# Altium PCB PCB_2020-12-05_22-15-21_2020-12-05_22-35-56.pcbdoc
Units mil, origin at the board's own origin, x right, y up, seen from the top; angles counter-clockwise.
Board outline 4410 x 3910 mil, 2 copper layers (Top Layer, Bottom Layer); 53 components, 84 nets, 253 pads, 0 vias.
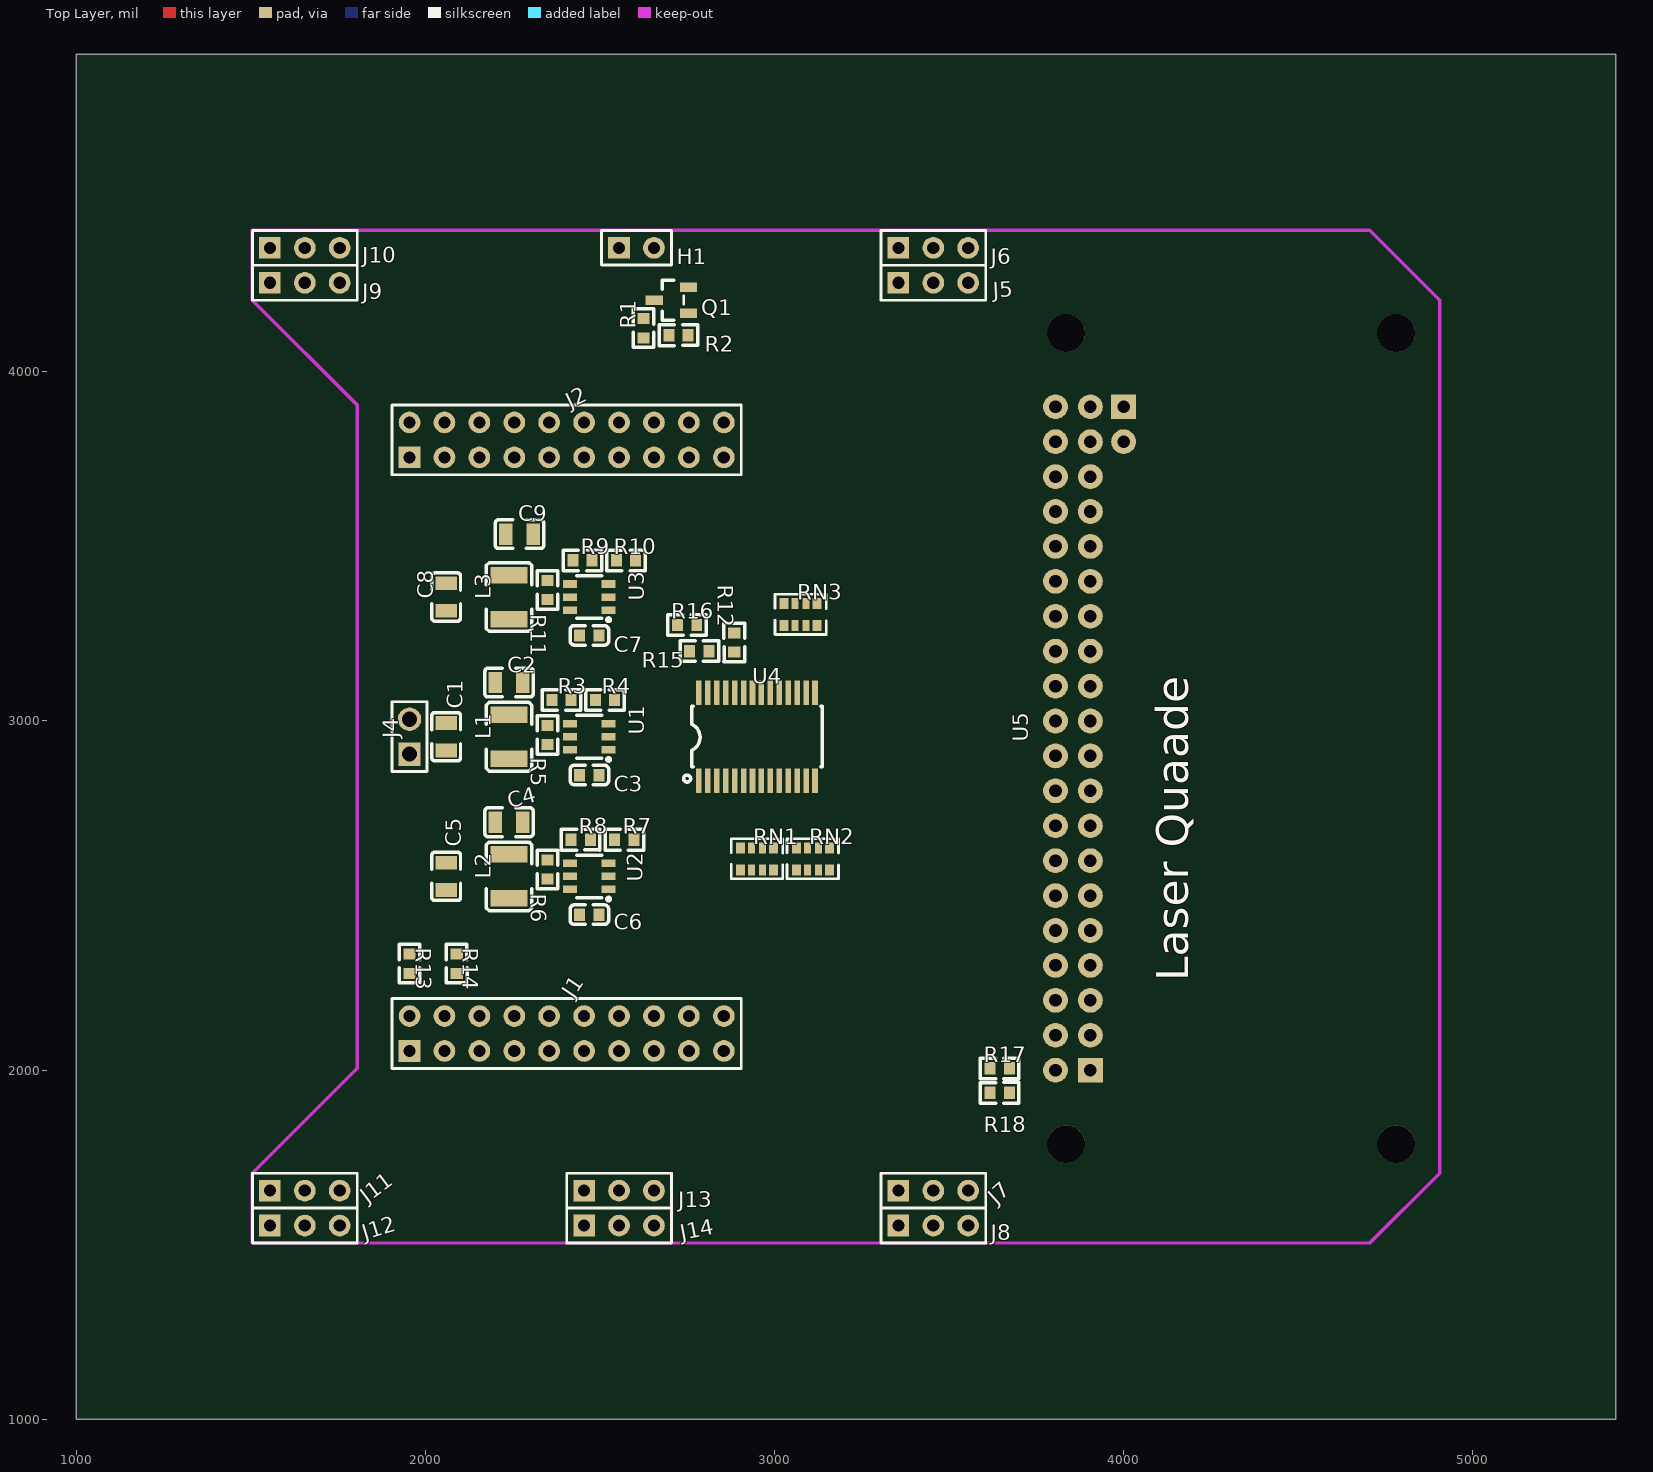
[diagram p0: Top Layer view]
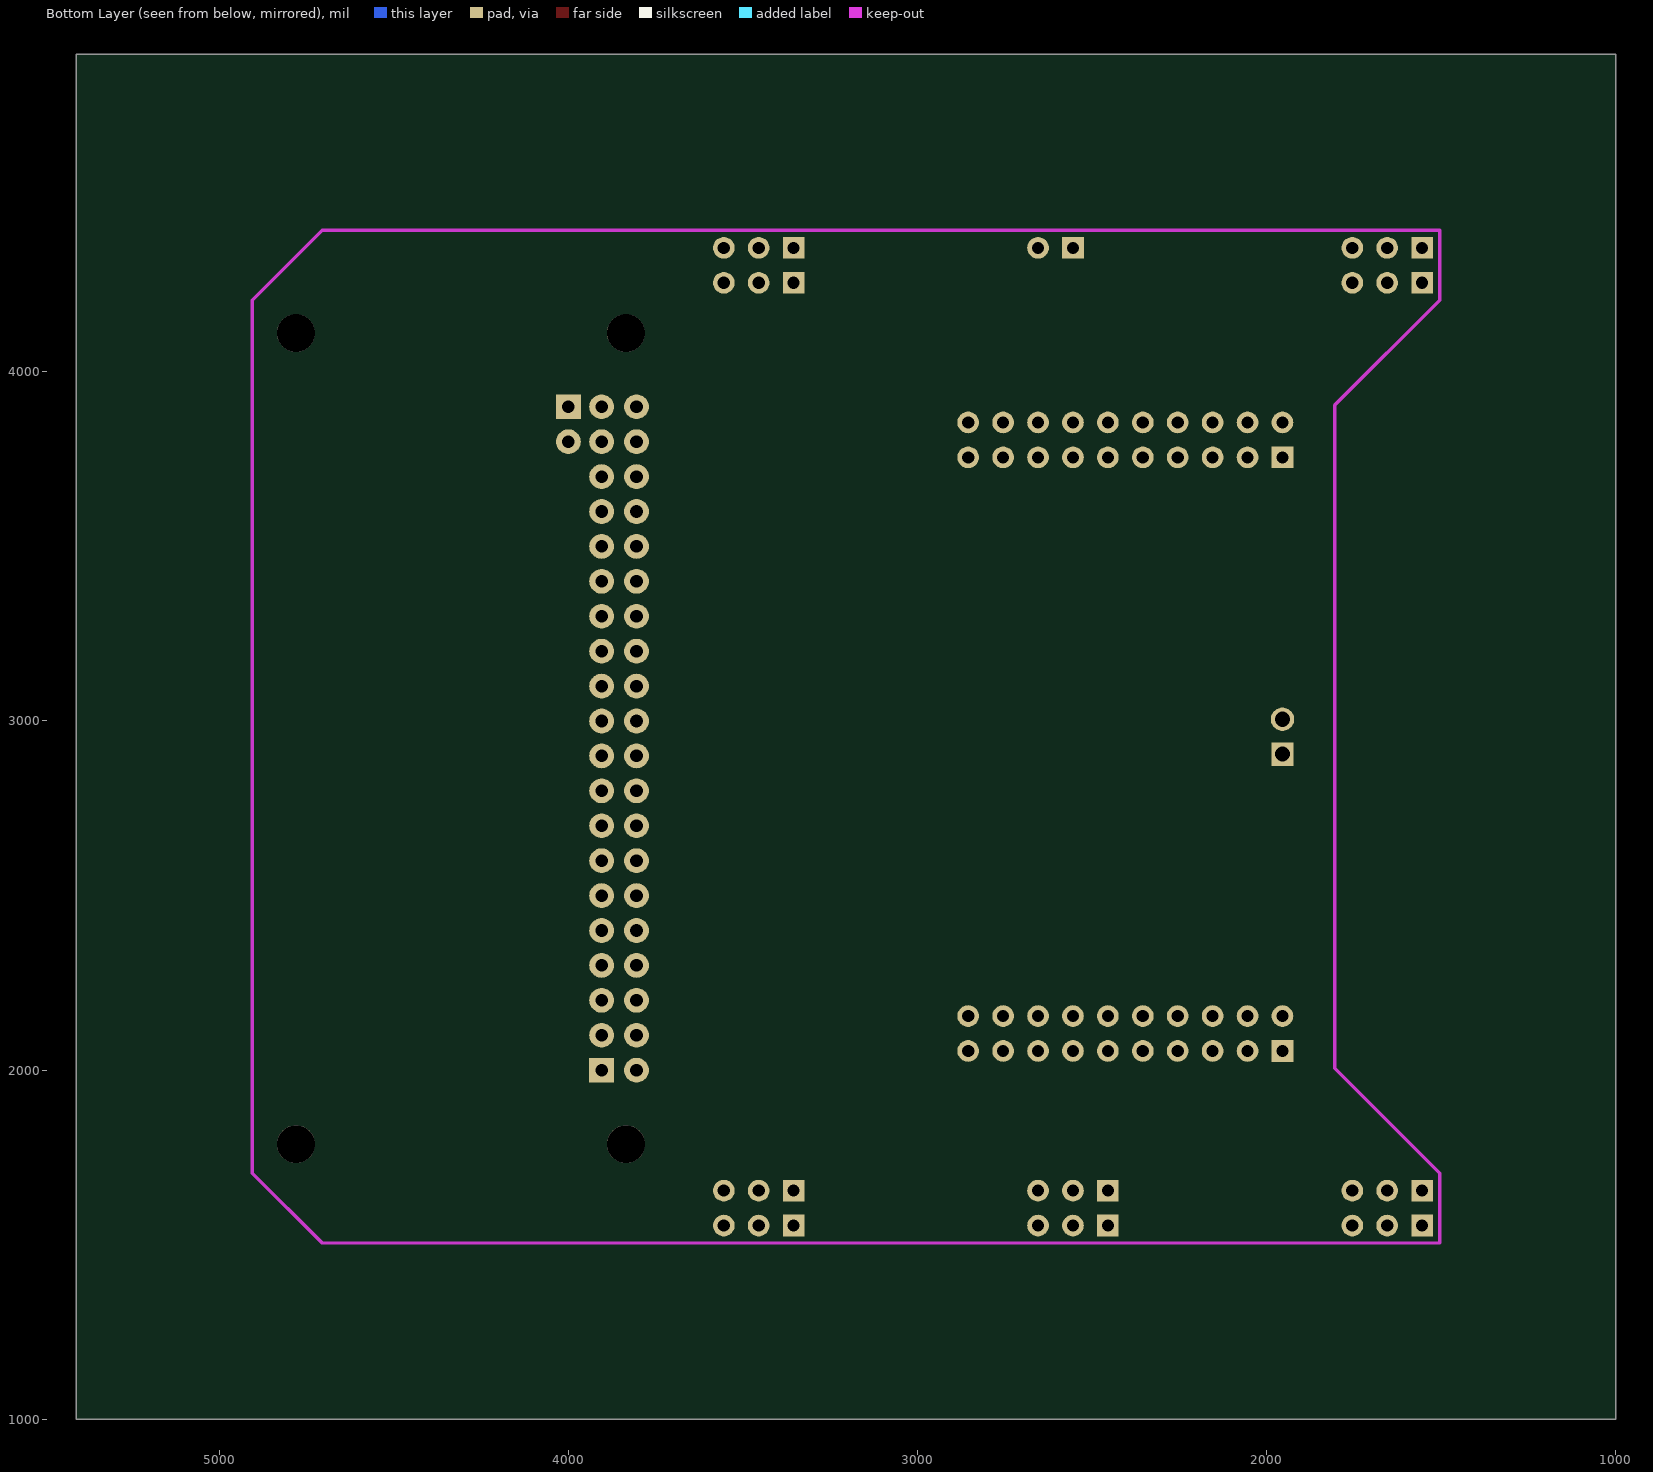
[diagram p1: Bottom Layer view, seen from below]

## Layer stack, top to bottom
Top Layer: signal copper (thickness not stored)
Dielectric: dielectric 12.6, FR-4, Dk 4.8
Bottom Layer: signal copper (thickness not stored)

## Board outline
5410,1000 1000,1000 1000,4910 5410,4910

## Components (designator, comment, footprint, x,y, rotation, side; value= is the part's Value field where it differs from the comment)
C1 "22uF" C0805 2060,2955 r90 top
C2 "22uF" C0805 2240,3110 r0 top
C3 "22nF" C0603 2470,2845 r0 top
C4 "22uF" C0805 2240,2710 r0 top
C5 "22uF" C0805 2060,2555 r90 top
C6 "22nF" C0603 2470,2445 r0 top
C7 "22nF" C0603 2470,3245 r0 top
C8 "22uF" C0805 2060,3355 r90 top
C9 "22uF" C0805 2270,3535 r0 top
H1 "Laser Diode" HDR-F-2.54_1X2 2605,4355 r0 top
J1 "HDR-M-2.54_2x10" HDR-M-2.54_2X10 2405,2105 r0 top
J2 "HDR-M-2.54_2x10" HDR-M-2.54_2X10 2405,3805 r0 top
J4 "HDR-M-2.54_1x2" HDR-M-2.54_1X2 1955,2955 r90 top
J5 "HDR-M-2.54_1x3" HDR-M-2.54_1X3 3455,4255 r0 top
J6 "HDR-M-2.54_1x3" HDR-M-2.54_1X3 3455,4355 r0 top
J7 "HDR-M-2.54_1x3" HDR-M-2.54_1X3 3455,1655 r0 top
J8 "HDR-M-2.54_1x3" HDR-M-2.54_1X3 3455,1555 r0 top
J9 "HDR-M-2.54_1x3" HDR-M-2.54_1X3 1655,4255 r0 top
J10 "HDR-M-2.54_1x3" HDR-M-2.54_1X3 1655,4355 r0 top
J11 "HDR-M-2.54_1x3" HDR-M-2.54_1X3 1655,1655 r0 top
J12 "HDR-M-2.54_1x3" HDR-M-2.54_1X3 1655,1555 r0 top
J13 "HDR-M-2.54_1x3" HDR-M-2.54_1X3 2555,1655 r0 top
J14 "HDR-M-2.54_1x3" HDR-M-2.54_1X3 2555,1555 r0 top
L1 "10uH" L1210 2240,2955 r90 top
L2 "10uH" L1210 2240,2555 r90 top
L3 "10uH" L1210 2240,3355 r90 top
Q1 "NPN Transistor" SOT-23-3_L2.9-W1.3-P1.90-LS2.4-TR 2705,4205 r0 top
R1 "10K" R0603 2625,4125 r90 top
R2 "1K" R0603 2725,4105 r180 top
R3 "91K" R0603 2390,3060 r0 top
R4 "11.3K" R0603 2515,3060 r180 top
R5 "10K" R0603 2350,2960 r270 top
R6 "10K" R0603 2350,2575 r270 top
R7 "22K" R0603 2570,2660 r180 top
R8 "100K" R0603 2445,2660 r0 top
R9 "100K" R0603 2450,3460 r0 top
R10 "22K" R0603 2575,3460 r180 top
R11 "10K" R0603 2350,3375 r270 top
R12 "10K" R0603 2885,3225 r270 top
R13 "0" R0603 1955,2305 r270 top
R14 "0" R0603 2090,2305 r270 top
R15 "4.7K" R0603 2785,3200 r0 top
R16 "4.7K" R0603 2750,3275 r0 top
R17 "0" R0603 3645,2005 r0 top
R18 "0" R0603 3645,1935 r0 top
RN1 "220" RES-ARRAY-SMD_0603-8P-L3.2-W1.6-BL 2950,2605 r0 top
RN2 "220" RES-ARRAY-SMD_0603-8P-L3.2-W1.6-BL 3110,2605 r0 top
RN3 "220" RES-ARRAY-SMD_0603-8P-L3.2-W1.6-BL 3075,3305 r0 top
U1 "MT2492" SOT-23-6_L2.9-W1.6-P0.95-LS2.8-BL 2470,2955 r90 top
U2 "MT2492" SOT-23-6_L2.9-W1.6-P0.95-LS2.8-BL 2470,2555 r90 top
U3 "MT2492" SOT-23-6_L2.9-W1.6-P0.95-LS2.8-BL 2470,3355 r90 top
U4 "PCA9685PW/Q900,118" TSSOP-28_L9.7-W4.4-P0.65-LS6.4-BL 2950,2955 r0 top
U5 "Raspberry Pi Zero W" "RASPBERRY PI ZERO" 4305,2950 r90 top

## Footprints (in the part's own frame and the unit in brackets; to place one, negate y for a bottom-side part, rotate by r counter-clockwise, add the part's x,y. Pads: shape width x height; smd on the part's side, far side on the other; paste and mask are expansions set on the pad)
C0603 [mm]
  rect 0.8x0.9 smd: 1(-0.7,0) 2(0.7,0)
  silkscreen extent -1.4,-0.7 1.4,0.72
C0805 [mm]
  rect 1x1.55 smd: 1(-1,0) 2(1,0)
  silkscreen extent -1.75,-1.04 1.75,1.04
HDR-F-2.54_1X2 [mil]
  rect 62x62 hole 35: 1(-50,0)
  round 62 hole 35: 2(50,0)
  silkscreen extent -100,-49 100,50
HDR-M-2.54_1X2 [mm]
  rect 1.7x1.575 hole 1.1: 1(-1.27,0)
  round 1.7 hole 1.1: 2(1.27,0)
  silkscreen extent -2.54,-1.27 2.54,1.27
HDR-M-2.54_1X3 [mil]
  rect 62x62 hole 35: 1(-100,0)
  round 62 hole 35: 2(0,0) 3(100,0)
  silkscreen extent -150,-50 150,50
HDR-M-2.54_2X10 [mil]
  rect 62x62 hole 35: 1(-450,-50)
  round 62 hole 35: 2(-450,50) 3(-350,-50) 4(-350,50) 5(-250,-50) 6(-250,50) 7(-150,-50) 8(-150,50) 9(-50,-50) 10(-50,50) 11(50,-50) 12(50,50) 13(150,-50) 14(150,50) 15(250,-50) 16(250,50) 17(350,-50) 18(350,50) 19(450,-50) 20(450,50)
  silkscreen extent -500,-100 500,100
L1210 [mm]
  rect 1.2x2.7 smd: 1(-1.6,0) 2(1.6,0)
  silkscreen extent -2.5,-1.65 2.5,1.65
R0603 [mm]
  rect 0.8x0.9 smd: 1(-0.7,0) 2(0.7,0)
  silkscreen extent -1.4,-0.75 1.4,0.76
"RASPBERRY PI ZERO" [mm]
  rect 1.8x1.8 hole 0.914: 1(-24.13,10.16) 42(24.13,7.747)
  round 1.8 hole 0.914: 2(-24.131,12.7) 3(-21.591,10.16) 4(-21.591,12.7) 5(-19.051,10.16) 6(-19.051,12.7) 7(-16.511,10.16) 8(-16.511,12.7) 9(-13.971,10.16) 10(-13.971,12.7) 11(-11.431,10.16) 12(-11.431,12.7) 13(-8.891,10.16) 14(-8.891,12.7) 15(-6.351,10.16) 16(-6.351,12.7) 17(-3.811,10.16) 18(-3.811,12.7) 19(-1.271,10.16) 20(-1.271,12.7) 21(1.269,10.16) 22(1.269,12.7) 23(3.809,10.16) 24(3.809,12.7) 25(6.349,10.16) 26(6.349,12.7) 27(8.889,10.16) 28(8.889,12.7) 29(11.429,10.16) 30(11.429,12.7) 31(13.969,10.16) 32(13.969,12.7) 33(16.509,10.16) 34(16.509,12.7) 35(19.049,10.16) 36(19.049,12.7) 37(21.589,10.16) 38(21.589,12.7) 39(24.13,10.16) 40(24.13,12.7) 41(21.59,7.747)
  round 2.748 hole 2.748 unplated: ""(-29.513,-12.07) ""(-29.513,11.931) ""(29.486,-12.07) ""(29.486,11.931)
RES-ARRAY-SMD_0603-8P-L3.2-W1.6-BL [mm]
  rect 0.65x0.8 smd: 1(-1.2,-0.8) 4(1.2,-0.8) 5(1.2,0.8) 8(-1.2,0.8)
  rect 0.5x0.8 smd: 2(-0.4,-0.8) 3(0.4,-0.8) 6(0.4,0.8) 7(-0.4,0.8)
  silkscreen extent -1.87,-1.45 1.87,1.47
SOT-23-3_L2.9-W1.3-P1.90-LS2.4-TR [mm]
  rect 1.25x0.7 smd: 1(1.25,0.95) 2(1.25,-0.95) 3(-1.25,0)
  silkscreen extent -0.65,-1.46 0.9,1.46
SOT-23-6_L2.9-W1.6-P0.95-LS2.8-BL [mm]
  rect 0.55x1 smd: 1(-0.95,-1.4) 2(0,-1.4) 3(0.95,-1.4) 4(0.95,1.4) 5(0,1.4) 6(-0.95,1.4)
  silkscreen extent -1.78,-1.52 1.55,0.9
TSSOP-28_L9.7-W4.4-P0.65-LS6.4-BL [mil]
  rect 16x71 smd: 1(-166.34,-125.98) 2(-140.75,-125.98) 3(-115.16,-125.98) 4(-89.57,-125.98) 5(-63.98,-125.98) 6(-38.39,-125.98) 7(-12.8,-125.98) 8(12.79,-125.98) 9(38.38,-125.98) 10(63.97,-125.98) 11(89.56,-125.98) 12(115.15,-125.98) 13(140.74,-125.98) 14(166.34,-125.98) 15(166.34,125.98) 16(140.75,125.98) 17(115.16,125.98) 18(89.57,125.98) 19(63.98,125.98) 20(38.39,125.98) 21(12.8,125.98) 22(-12.79,125.98) 23(-38.38,125.98) 24(-63.97,125.98) 25(-89.57,125.98) 26(-115.16,125.98) 27(-140.75,125.98) 28(-166.34,125.98)
  silkscreen extent -210,-130 187,87

## Nets (pads, with @x,y where several pads share a name; then routed paths per layer and width w, separated by ;. In a path a pad name is that pad's centre, name@x,y a point inside that pad or via, vN(x,y) a via of type N, cw(c..) or ccw(c..) an arc to the next point about the centre after c; other vN are vias at no path point)
+3V3: C4.2 C9.2 J5.2 J6.2 J7.2 J8.2 J9.2 J10.2 J11.2 J12.2 J13.2 J14.2 L2.2 L3.2 R8.1 R9.1 R14.1 R15.1 R16.1 R18.1 U4.28
+5V: C2.2 H1.1 L1.2 R3.1 R13.1 R17.1
BAT+: C1.2 C5.2 C8.2 J4.2 R5.2 R6.2 R11.2 U1.5 U2.5 U3.5
C6_2: C6.2 U2.1
GND: C1.1 C2.1 C4.1 C5.1 C8.1 C9.1 J1.4 J2.2 J4.1 J5.3 J6.3 J7.3 J8.3 J9.3 J10.3 J11.3 J12.3 J13.3 J14.3 Q1.1 R1.2 R4.1 R7.1 R10.1 R12.1 U1.2 U2.2 U3.2 U4.1 U4.2 U4.3 U4.4 U4.5 U4.14 U4.24 U4.25 U5.6 U5.9 U5.14 U5.20 U5.25 U5.30 U5.34 U5.39
L2_1: C6.1 L2.1 U2.6
LEG1A: J10.1 RN1.2
LEG1S: J9.1 RN1.1
LEG2A: J12.1 RN1.4
LEG2S: J11.1 RN1.3
LEG3A: J6.1 RN2.2
LEG3S: J5.1 RN2.1
LEG4A: J8.1 RN2.4
LEG4S: J7.1 RN2.3
MSP_3V3: J1.1 R14.2
MSP_5V: J1.2 R13.2
P1.5: J1.13
P2.3: J2.13
P2.4: J2.5
P2.5: J2.4
P2.6: J2.3
P2.7: J2.1
P3.0: J2.6
P3.2: J1.5
P3.3: J1.7
P3.5: J2.17
P3.6: J2.20 R1.1 R2.2
P3.7: J2.19
P4.0: J1.8
P4.1: J1.9
P4.2: J1.10
P4.3: J1.11
P4.4: J1.12
P4.5: J1.14
P4.6: J1.15
P4.7: J1.16
P5.1: J2.15
P5.4: J1.18
P5.5: J1.20
P5.6: J2.7
P5.7: J2.8
P6.0: J1.3
P6.1: J1.6
P6.4: J1.19
P6.5: J1.17
P6.6: J2.9
P6.7: J2.11
Q1_2: Q1.2 R2.1
Q1_3: H1.2 Q1.3
R6_1: R6.1 U2.4
R7_2: R7.2 R8.2 U2.3
R_RX: J2.18 U5.10
R_TX: J2.16 U5.8
RPI_3V3: R18.2 U5.1 U5.17
RPI_5V: R17.2 U5.2 U5.4
RST: J2.10
S$68: 
S$2140: 
S$2142: 
SCL: J2.14 R15.2 U4.26
SDA: J2.12 R16.2 U4.27
TURRETBASE: J14.1 RN3.5
TURRETHEAD: J13.1 RN3.6
U1_1: C3.2 U1.1
U1_3: R3.2 R4.2 U1.3
U1_4: R5.1 U1.4
U1_6: C3.1 L1.1 U1.6
U3_1: C7.2 U3.1
U3_3: R9.2 R10.2 U3.3
U3_4: R11.1 U3.4
U3_6: C7.1 L3.1 U3.6
U4_6: RN1.8 U4.6
U4_7: RN1.7 U4.7
U4_8: RN1.6 U4.8
U4_9: RN1.5 U4.9
U4_10: RN2.8 U4.10
U4_11: RN2.7 U4.11
U4_12: RN2.6 U4.12
U4_13: RN2.5 U4.13
U4_15: RN3.4 U4.15
U4_16: RN3.3 U4.16
U4_17: RN3.2 U4.17
U4_18: RN3.1 U4.18
U4_23: R12.2 U4.23
pads on no net: RN3.7 RN3.8 U4.19 U4.20 U4.21 U4.22 U5. U5.3 U5.5 U5.7 U5.11 U5.12 U5.13 U5.15 U5.16 U5.18 U5.19 U5.21 U5.22 U5.23 U5.24 U5.26 U5.27 U5.28 U5.29 U5.31 U5.32 U5.33 U5.35 U5.36 U5.37 U5.38 U5.40 U5.41 U5.42

## Silkscreen, mask and mechanical layers (free items; w line width, h text height)
Top Overlay:
  text "Laser Quaade" at 4215,2255 h157.48 r90